# Altium PCB PCB_Transmitter_V2.PcbDoc
Units mm, origin at the board's own origin, x right, y up, seen from the top; angles counter-clockwise.
Board outline 42.04 x 58.55 mm, 2 copper layers (Top Layer, Bottom Layer); 19 components, 34 nets, 82 pads, 17 vias.
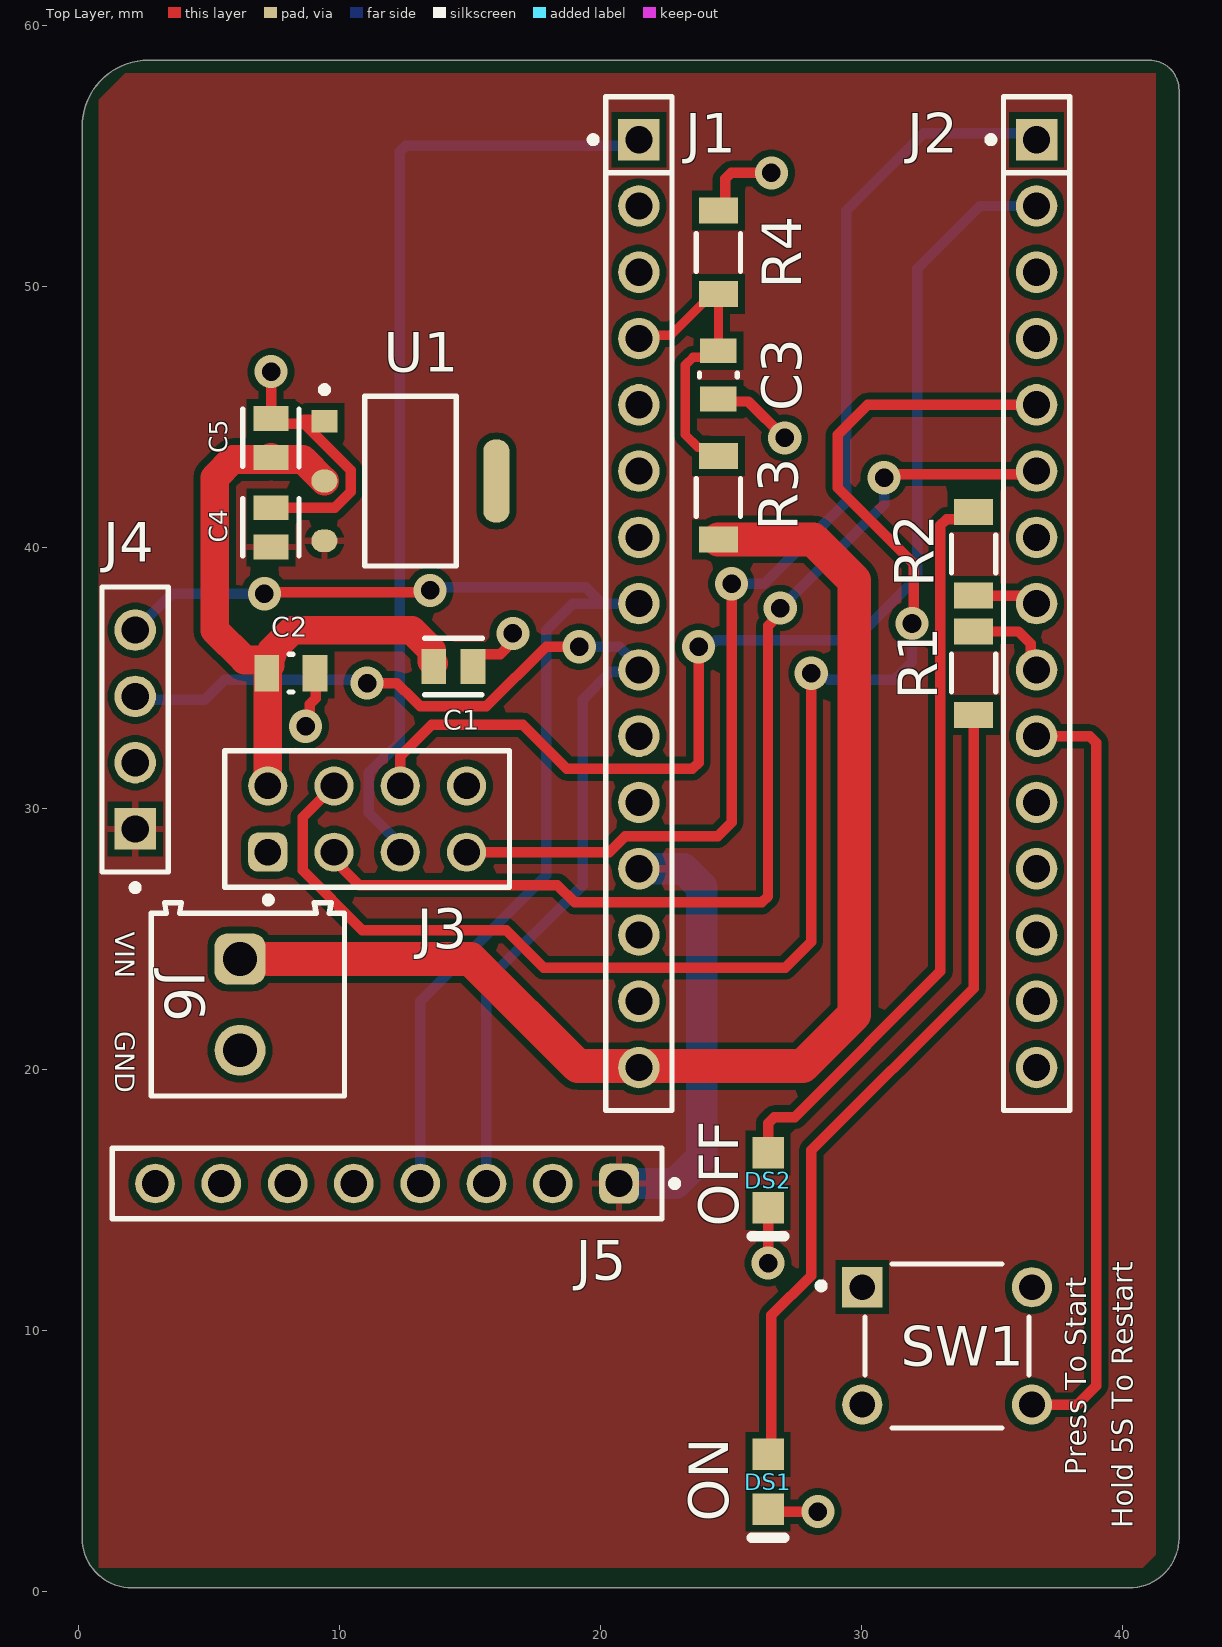
[diagram p0: Top Layer view]
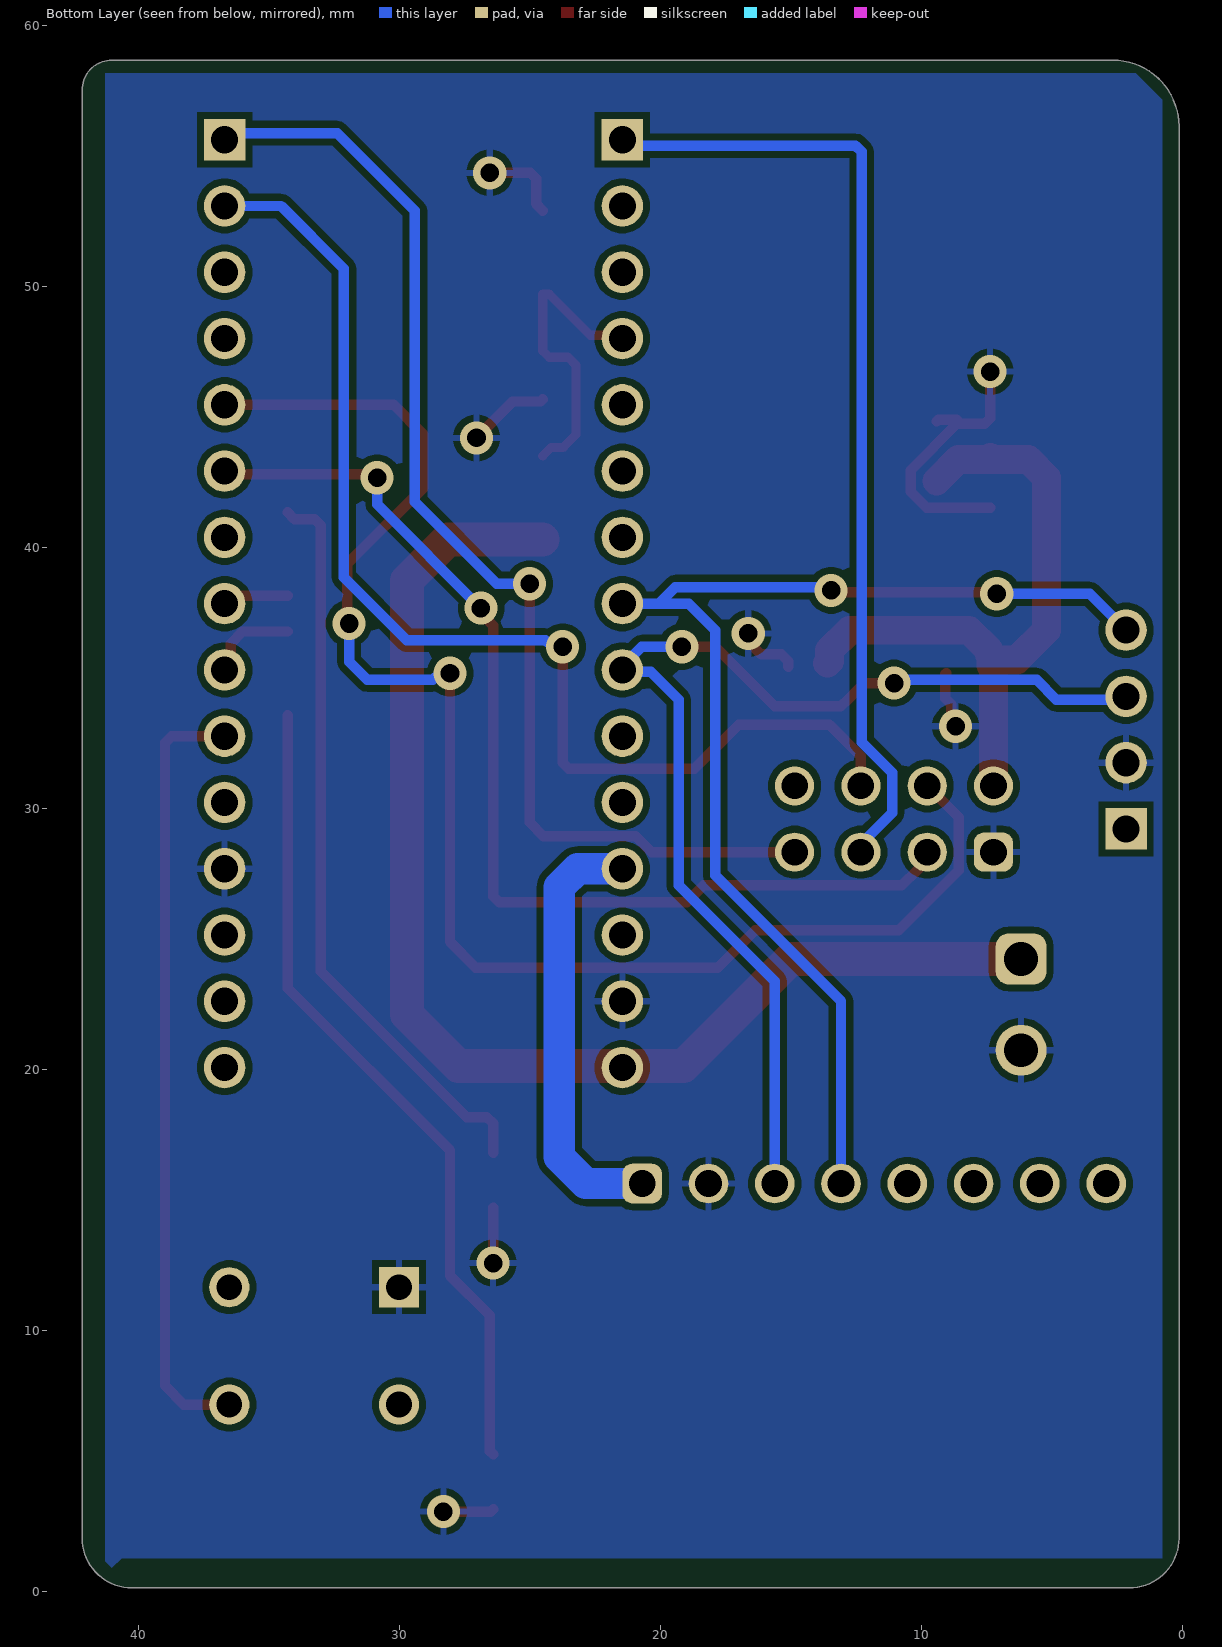
[diagram p1: Bottom Layer view, seen from below]
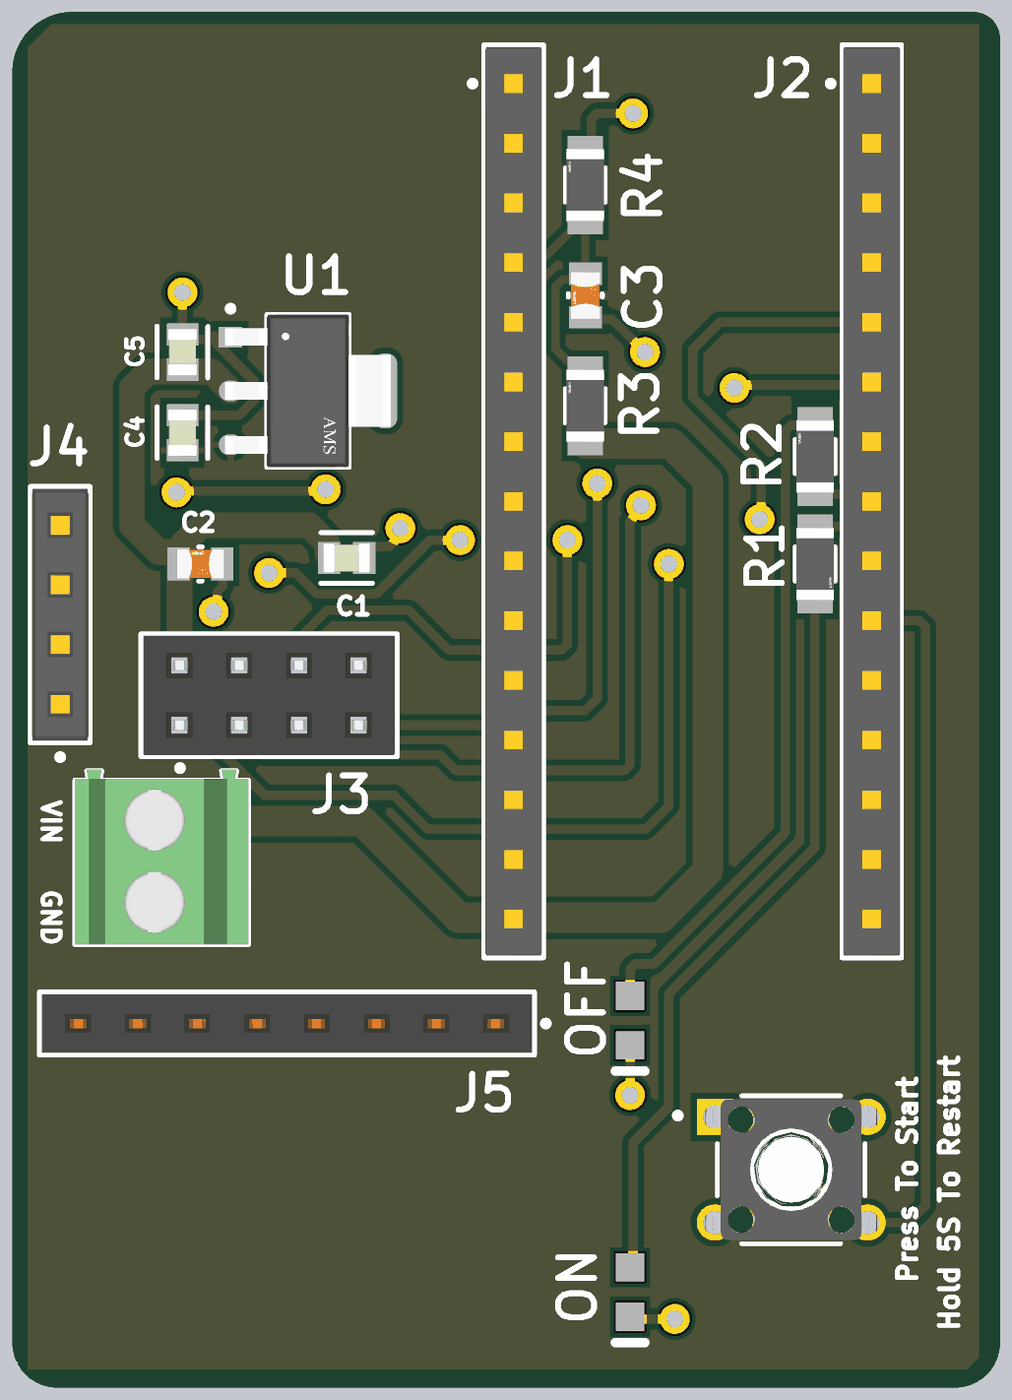
[diagram p2: 3D render of the assembled board from above, using the file's embedded part models]

## Layer stack, top to bottom
Top Solder: solder mask 0.0102, Solder Resist, Dk 3.5
Top Layer: signal copper 0.0356
Dielectric 1: dielectric 0.32, FR-4, Dk 4.8
Bottom Layer: signal copper 0.0356
Bottom Solder: solder mask 0.0102, Solder Resist, Dk 3.5

## Board outline
0.127,2.032 ccw(c2.032,2.032) 2.032,0.127 40.259,0.127 ccw(c40.259,2.032) 42.164,2.032 42.164,57.531 ccw(c41.021,57.531) 41.021,58.674 2.667,58.674 ccw(c2.667,56.134) 0.127,56.134

## Design rules (kind name [scope] priority, off if disabled: settings)
Clearance [All] p1: gap=0.254 ignorepadtopadclearanceinfootprint=FALSE
PolygonConnect [All] p1: connectstyle=Relief reliefconductorwidth=0.254 reliefentries=4 polygonreliefangle="90 Angle" airgapwidth=0.254
RoutingVias [All] p1: holewidth=0.711 width=1.27 viastyle="Through Hole" minholewidth=0.711 minwidth=1.27 maxholewidth=0.711 maxwidth=1.27
SilkToSilkClearance [All] p1: silktosilkclearance=0.15
SolderMaskExpansion [All] p1: expansion=0.102 istentingtop=FALSE
SupplyNets "Schematic Supply Nets_3" [InNet('+5V')] p1: voltage=0.000
SupplyNets "Schematic Supply Nets_2" [InNet('GND')] p2: voltage=0.000
SupplyNets "Schematic Supply Nets_1" [InNet('+3V3')] p3: voltage=0.000
SupplyNets "Schematic Supply Nets" [InNet('VIN')] p4: voltage=0.000
Width [All] p1: maxlimit=1.5 minlimit=0.254 preferedwidth=0.254
29 further rules are at their usual default settings.

## Components (designator, comment, footprint, x,y, rotation, side; value= is the part's Value field where it differs from the comment)
C1 "10uF" FP-C0805C-DG-MFG 14.351,35.433 r180 top
C2 "100nF" FP-CC0805-0_85-MFG 8.128,35.179 r180 top value="100 nF"
C3 "100nF" FP-CC0805-0_85-MFG 24.511,46.609 r270 top value="100 nF"
C4 "10uF" FP-C0805C-DG-MFG 7.366,40.767 r270 top
C5 "10uF" FP-C0805C-DG-MFG 7.366,44.196 r270 top
DS1 "Red LED" AVAG-HSMX-C170_V 26.416,4.191 r270 top
DS2 "Green LED" AVAG-HSMX-C170_V 26.416,15.748 r270 top
J1 "SSW-115-01-T-S" FP-SSW-115-01-T-S-MFG 21.463,37.846 r270 top locked
J2 "SSW-115-01-T-S" FP-SSW-115-01-T-S-MFG 36.703,37.846 r270 top locked
J3 "61300821821" 61300821821 11.049,29.591 r0 top
J4 "SSW-104-02-G-S" FP-SSW-104-02-G-S-MFG 2.159,33.02 r90 top
J5 "61300811821" 61300811821 11.811,15.621 r180 top
J6 "691214110002" 691214110002 6.477,22.479 r270 top
R1 "47R" FP-RC1206-MFG 34.29,35.179 r270 top value=0Ω
R2 "47R" FP-RC1206-MFG 34.29,39.751 r90 top value=0Ω
R3 "10kR" FP-RC1206-MFG 24.511,41.91 r90 top value=0Ω
R4 "10kR" FP-RC1206-MFG 24.511,51.308 r90 top value=0Ω
SW1 "2-1825910-7" FP-2-1825910-7-MFG 33.274,9.398 r90 top
U1 "AMS1117-3.3" FP-AMS1117-IPC_C 12.707,42.545 r0 top

## Footprints (in the part's own frame and the unit in brackets; to place one, negate y for a bottom-side part, rotate by r counter-clockwise, add the part's x,y. Pads: shape width x height; smd on the part's side, far side on the other; paste and mask are expansions set on the pad)
61300811821 [mm] "Socket Header, Pitch 2.54 mm, THT, Vertical, single row, 8p"
  rrect50% 1.52x1.52 hole 1.02: 1(-8.89,0)
  round 1.52 hole 1.02: 2(-6.35,0) 3(-3.81,0) 4(-1.27,0) 5(1.27,0) 6(3.81,0) 7(6.35,0) 8(8.89,0)
  silkscreen extent -11.15,-1.35 10.54,1.35, body extent -10.41,-1.25 10.41,1.25, height 8.55
61300821821 [mm] "Socket Header, Pitch 2.54 mm, THT, Vertical, dual row, 8p"
  rrect50% 1.5x1.5 hole 1.02: 1(-3.81,-1.27)
  round 1.5 hole 1.02: 2(-3.81,1.27) 3(-1.27,-1.27) 4(-1.27,1.27) 5(1.27,-1.27) 6(1.27,1.27) 7(3.81,-1.27) 8(3.81,1.27)
  silkscreen extent -5.46,-3.22 5.46,2.62, body extent -5.33,-2.54 5.33,2.54, height 8.45
691214110002 [mm] "3.50 mm Horizontal Entry Modular, 2p"
  rrect50% 1.95x1.95 hole 1.3: 1(-1.75,-0.3)
  round 1.95 hole 1.3: 2(1.75,-0.3)
  silkscreen extent -3.9,-3.7 3.5,3.7, body extent -3.95,-3.7 3.5,3.7, height 8.55
AVAG-HSMX-C170_V [mm] "SMD, 2-Leads, Body 2x1.25mm, Height 0.8mm"
  rect 1.2x1.2 smd: 1(-1.05,0) 2(1.05,0)
  silkscreen extent 2.15,-0.63 2.15,0.63, body extent -1,-0.63 1,0.63, height 0.8
FP-2-1825910-7-MFG [mm]
  rect 1.54x1.54 hole 0.99 paste-2539.97 mask+0: 1(2.25,3.25)
  round 1.54 hole 0.99 paste-2539.97 mask+0: 2(2.25,-3.25) 3(-2.25,3.25) 4(-2.25,-3.25)
  silkscreen extent -3.15,-3.15 3.15,4.95, body extent -3.24,-4.12 3.24,4.12, height 0.25
FP-AMS1117-IPC_C [mm]
  rect 1.004x0.872 smd paste+0 mask+0: 1(-3.295,2.29)
  rrect100% 1.004x0.872 smd paste+0 mask+0: 2(-3.295,0) 3(-3.295,-2.29)
  rrect87% 1.004x3.182 smd paste+0 mask+0: 4(3.295,0)
  silkscreen extent -3.42,-3.25 1.75,3.62, body extent -3.9,-3.35 3.9,3.35, height 0.25
FP-C0805C-DG-MFG [mm]
  rect 0.95x1.35 smd paste+0 mask+0: 1(-0.75,0) 2(0.75,0)
  silkscreen extent -1.11,-1.08 1.1,1.07, body extent -1.4,-0.85 1.4,0.85, height 0.25
FP-CC0805-0_85-MFG [mm]
  rect 0.95x1.4 smd paste+0 mask+0: 1(-0.925,0) 2(0.925,0)
  silkscreen extent -0.08,-0.72 0.08,0.72, body extent -1.6,-1.05 1.6,1.05, height 0.25
FP-RC1206-MFG [mm]
  rect 1x1.5 smd paste+0 mask+0: 1(-1.6,0) 2(1.6,0)
  silkscreen extent -0.72,-0.85 0.72,0.85, body extent -2.2,-0.95 2.2,0.95, height 0.25
FP-SSW-104-02-G-S-MFG [mm]
  rect 1.59x1.59 hole 1.04 paste-2539.97 mask+0: 1(-3.81,0)
  round 1.59 hole 1.04 paste-2539.97 mask+0: 2(-1.27,0) 3(1.27,0) 4(3.81,0)
  silkscreen extent -6.18,-1.27 5.46,1.27, body extent -5.56,-1.37 5.56,1.37, height 0.25
FP-SSW-115-01-T-S-MFG [mm]
  rect 1.59x1.59 hole 1.04 paste-2539.97 mask+0: 1(-17.78,0)
  round 1.59 hole 1.04 paste-2539.97 mask+0: 2(-15.24,0) 3(-12.7,0) 4(-10.16,0) 5(-7.62,0) 6(-5.08,0) 7(-2.54,0) 8(0,0) 9(2.54,0) 10(5.08,0) 11(7.62,0) 12(10.16,0) 13(12.7,0) 14(15.24,0) 15(17.78,0)
  silkscreen extent -19.43,-1.87 19.43,1.27, body extent -19.53,-1.37 19.53,1.37, height 0.25

## Part data
C1 C4 C5: library part CMP-2007-03243-2, "CAP CER 10UF 10V X5R 0805", 3DS Part Number=220-00001, Manufacturer=Kemet, Manufacturer Part Number=C0805C106K8PACTU, Package=C0805C-DG, Temperature="-55°C to +85°C", Temperature Characteristic=X5R, Temperature Coefficient=15%, Temperature Range High=+85°C, Temperature Range Low=-55°C, Tolerance=10%, Voltage=10V, Automotive=No, Capacitance=10uF, Category=Cap, ComponentLink2Description=Datasheet, ComponentLink2URL=https://content.kemet.com/datasheets/KEM_C1006_X5R_SMD.pdf, Device Class L1="Passive Components", Device Class L2=Capacitors, Device Class L3="Ceramic Capacitors", Digikey Description="CAP CER 10UF 10V X5R 0805", Height=1.4mm, Ipc Land Pattern Name=CAPC200125X125, Lead Free=Yes, Material=Ceramic, Mouser Description="CAP CER 10UF 10V X5R 0805", Octopart=https://octopart.com/c0805c106k8pactu-kemet-98697, RoHS=TRUE, Voltage Rating=10V
C2 C3: library part CMP-1036-04402-6, "CAP CER 0.1UF 16V X7R 0805", Capacitance="100 nF", Manufacturer=Yageo, Manufacturer Part Number=CC0805KRX7R7BB104, Package=CC0805-0.85, Temperature="-30°C to +85°C", Temperature Characteristic=X7R, Temperature Range High=+85°C, Temperature Range Low=-30°C, Tolerance=0.1, Voltage Rating="16 V", Automotive=No, Category=Cap, ComponentLink2Description=Datasheet, ComponentLink2URL=http://www.yageo.com/documents/recent/UPY-GPHC_Y5V_6.3V-to-50V_8.pdf, Device Class L1="Passive Components", Device Class L2=Capacitors, Device Class L3="Ceramic Capacitors", Digikey Description="CAP CER 0.1UF 16V X7R 0805", Footprint Url=http://www.yageo.com/exep/pages/download/literatures/UPY-C_GEN_24.pdf, Height=0.95mm, Ipc Land Pattern Name=CAPC200125X85, Lead Free=Yes, Material=Ceramic, Mouser Description="Multilayer Ceramic Capacitors MLCC - SMD/SMT 100nF 16V X7R 10%", Octopart=https://octopart.com/cc0805krx7r7bb104-yageo-39467769, RoHS=TRUE
DS1 DS2: library part CMP-2000-05062-1, "Chip LED, Green, 2.2 V, -40 to 85 degC, 2-Pin SMD, Pb-Free, Tape and Reel", Forward Current If=20mA, Forward Voltage=2.2V, Forward Voltage VF Max=2.6V, LED Colour=Green, Manufacturer=Avago, Operating Temperature Max=85degC, Operating Temperature Min=-30degC, Operating Temperature Range=-30degCto+85degC, Opto Case Style=SMD, Package Description="2-Pin Surface Mount Device, Body 2 x 1.25 mm, Height 0.8 mm", Package Reference=HSMX-C170, Storage Temperature Min=-40degC, Bulb Size=1.25mmx1.4mm, Datasheet URL=https://datasheet.ciiva.com/29280/180495-da-01-en-chip-led-hsmg-c170-gelb-gruen-29280971.pdf, Datasheet Version=Oct-08, Dominant Wavelength=572nm, Dominant Wavelength Typ=572nm, External Depth=0.8mm, External Length / Height=2mm, External Width=1.25mm, Forward Current If Max=20mA, LED Mounting=SMD, LED Type=Standard, Lens Shape=Rectangular, Light Area Height=1mm, Luminous Intensity=15mcd, Luminous Intensity Min=4mcd, Luminous Intensity Typ=15mcd, Manufacturer URL=http://www.avagotech.com/, Mounting Type=SMD, MSL=MSL2A-4weeks, No. of Pins=2, Opto Mounting Orientation=Top, Packaging=CutTape, Peak Forward Current=20mA, Peak Wavelength=570nm, PIV Max=5V, Storage Temperature Max=85degC, SVHC=NoSVHC(16-Jun-2014), Viewing Angle=170deg, Voltage Vf Typ=2.2V, Wavelength Typ=570nm
J1 J2: library part CMP-02766-001723-1, "CONN RCPT 15POS 0.1 TIN PCB", Color=Black, Contact Resistance=10mR, Max Current Rating=6.9A, Max Operating Temperature=105°C, Max Voltage Rating (AC)=550V, Min Operating Temperature=-55°C, Connector Type=Receptacle, Contact Material=Bronze, Contact Plating=Tin, Contact Type="Female Socket", Depth=2.41mm, Gender=Receptacle, Housing Color=Black, Housing Material=Polymer, Lead Free="Lead Free", Length=38.61mm, Mating Cycles=100, Mount="Through Hole", Number of Contacts=15, Number of Positions=15, Number of Rows=1, Orientation=Straight, Packaging=Bulk, Pitch=0.1inch, Radiation Hardening=No, REACH SVHC="No SVHC", RoHS Compliant=Yes, Series=SSW, Termination=Solder, Width=2.41mm
J3: library part CMP-1502-01329-3, Contact Resistance=20mΩ, Current Rating=3A, Operating Supply Voltage=250V, Gender=Female, Lead Pitch=2.54mm, NexarPartId=61924725, Number of Pins=8, Orientation=Vertical, RoHS=Non-Compliant
J4: library part CMP-00575-00296407-1, "SSW-104-02-G-S Board to Board & Mezzanine Connectors Tiger Buy Socket Strip with PCB Tails, .100 Pitch", Color=Black, Contact Resistance=10mΩ, Current Rating=4.7A, Manufacturer Lifecycle Status=PRODUCTION, Max Current Rating=6.9A, Max Operating Temperature=125°C, Max Voltage Rating (AC)=550V, Min Operating Temperature=-55°C, Voltage Rating (AC)=465V, Voltage Rating (DC)=655V, Connector Type="Receptacle, Socket", Contact Material="Bronze, Gold, Nickel", Contact Plating=Gold, Depth=2.41mm, Gender=Receptacle, Height=8.64mm, Housing Color=Black, Housing Material=Polymer, Lead Free="Lead Free", Lead Pitch=2.54mm, Length=10.67mm, Lifecycle Status=Production, Mount="Through Hole", NexarPartId=296407, Number of Contacts=4, Number of Positions=4, Number of Rows=1, Orientation=Straight, Packaging=Bulk, Pitch=2.54mm, Radiation Hardening=No, REACH SVHC="No SVHC", RoHS=Compliant, Termination=Solder, Voltage Rating=550V, Width=2.41mm
J5: library part CMP-1502-01327-3, Contact Resistance=20mΩ, Current Rating=3A, Operating Supply Voltage=250V, Gender=Female, Lead Pitch=2.54mm, NexarPartId=61924723, Number of Pins=8, Orientation=Vertical, RoHS=Non-Compliant
J6: library part CMP-1502-02464-2, Color="Blue, Green", Current=10A, Max Operating Temperature=105°C, Min Operating Temperature=-40°C, Voltage=300V, Contact Material=Brass, Contact Plating="Brass, Tin", Current Rating=10A, Height=8.7mm, Housing Material=Nylon, Lead Pitch=3.5mm, Length=7.4mm, Mount="Through Hole", NexarPartId=18818288, Number of Contacts=2, Number of Levels=1, Number of Pins=2, Number of Positions Per Level=2, Number of Rows=1, Packaging=Box, Pitch=3.5052mm, Plating="Brass, Steel", REACH SVHC=Unknown, RoHS=Compliant, Stripping Length=-6mm, Termination=Screw, Voltage Rating=300V, Width=7.9mm, Wire Gauge (Max)=24AWG, Wire Gauge (Min)=16AWG, Wire/Cable Gauge=24AWG
R1 R2 R3 R4: library part CMP-2100-03681-2, "RES SMD 0 OHM JUMPER 1/4W 1206", Manufacturer=YAGEO, Manufacturer Part Number=RC1206JR-070RL, Package=RC1206, Power Rating=0.25W, Resistance=0Ω, Temperature="-55°C to +155°C", Temperature Coefficient=300ppm/°C, Temperature Range High=+155°C, Temperature Range Low=-55°C, Tolerance=5%, Voltage Rating=200V, Automotive=No, Category=Res, ComponentLink2Description=Datasheet, ComponentLink2URL=https://www.yageo.com/upload/media/product/productsearch/datasheet/rchip/PYu-RC_Group_51_RoHS_L_10.pdf, Composition="Thick Film", Device Class L1="Passive Components", Device Class L2=Resistors, Device Class L3="Chip SMD Resistors", Digikey Description="RES SMD 0 OHM JUMPER 1/4W 1206", Footprint Url=https://www.yageo.com/upload/website/yageo_PYu-R_Mount_10_19050818_343.pdf, Height=0.65mm, Ipc Land Pattern Name=RESC310160X55, Lead Free=Yes, Mouser Description="Resistor: thick film; SMD; 1206; 0O; 0.25W; ±5%; -55÷155°C", Octopart=https://octopart.com/rc1206jr-070rl-yageo-40025601, RoHS=TRUE, Series=RC
SW1: library part CMP-03402-000004-1, "SWITCH TACTILE SPST-NO 0.05A 24V", Contact Current Rating=50mA, Contact Resistance=100mΩ, Manufacturer="TE Connectivity", Operating Force=160gf, Temperature="-35°C to +85°C", Temperature Range High=+85°C, Temperature Range Low=-35°C, Voltage Rating Dc=24V, Automotive=No, Category=Switch, ComponentLink2Description=Datasheet, ComponentLink2URL=https://www.te.com/commerce/DocumentDelivery/DDEController?Action=showdoc&DocId=Customer+Drawing%7F1825910%7FC10%7Fpdf%7FEnglish%7FENG_CD_1825910_C10.pdf%7F2-1825910-7, Device Class L1=Electromechanical, Device Class L2=Switches, Device Class L3="Pushbutton Switches", Digikey Description="SWITCH TACTILE SPST-NO 0.05A 24V", Electromechanical Life=100000Cycles, Height=13.3mm, Lead Free=Yes, Manufacturer Part Number=2-1825910-7, Mount="Through Hole", Mouser Description="Switch Tactile OFF (ON) SPST Extended Round Button PC Pins 0.05A 24VDC 100000Cycles 1.57N Thru-Hole Loose", Octopart=https://octopart.com/2-1825910-7-te+connectivity-42270510, Package=2-1825910-7, RoHS=TRUE, Throw Configuration=SPST-NO
U1: library part CMP-209535-000001-1, "LDO Voltage Regulators 1A, 3.3V", Dropout Voltage=1.1V, Manufacturer="Advanced Monolithic Systems", Max Junction Temp=+125°C, Max Power Dissipation=1.2W, Max Supply Voltage=15V, Nominal Supply Current=5mA, Output Current=1A, Output Voltage=3.3V, Package=AMS1117, Temperature="-40°C to +125°C", Temperature Range Low=-40°C, Automotive=No, Category=IC, ComponentLink2Description=Datasheet, ComponentLink2URL=http://www.advanced-monolithic.com/pdf/ds1117.pdf, Device Class L1="Integrated Circuits (ICs)", Device Class L2="Power Management ICs", Device Class L3="Voltage Regulators - Linear", Height=1.8mm, Ipc Land Pattern Name=SOT229P700X180-4, Lead Free=Yes, Manufacturer Part Number=AMS1117-3.3, Number Of Outputs=1, Octopart=https://octopart.com/ams1117-3.3-advanced+monolithic+systems-25899300, Output Type=Fixed, RoHS=TRUE, Standoff Height=0.64mm, Temperature Range High=+125°C

## Via types
v1: diameter 1.27, hole 0.711, Top Layer to Bottom Layer, 17 vias

## Nets (pads, with @x,y where several pads share a name; then routed paths per layer and width w, separated by ;. In a path a pad name is that pad's centre, name@x,y a point inside that pad or via, vN(x,y) a via of type N, cw(c..) or ccw(c..) an arc to the next point about the centre after c; other vN are vias at no path point)
+3V3: C1.2 C2.2 C5.2 J3.2 U1.2 | length 25.9
  Top Layer w1.1: J3.2 7.239,35.394 7.33,35.485 7.33,35.56 C2.2@7.33,35.612 ; U1.2 8.586,43.371 7.441,43.371 C5.2 7.291,43.371 5.906,43.371 5.207,42.672 5.207,36.83 6.35,35.687 7.255,35.687 C2.2@7.33,35.612 ; C1.2@13.601,35.56 13.526,35.635 13.526,36.059 12.755,36.83 8.176,36.83 7.405,36.059 7.405,35.884 7.33,35.809 C2.2@7.33,35.612
+5V: C4.2 J1.12 J4.1 J5.1 U1.3 | length 16.6
  Bottom Layer w1.2: J5.1 22.86,15.621 23.876,16.637 23.876,26.983 23.173,27.686 J1.12
A0: C3.1 J1.4 R3.2 R4.1 | length 11.7
  Top Layer w0.35: J1.4 21.59,48.133 22.686,48.133 24.261,49.708 R4.1 C3.1 24.265,47.288 23.539,47.288 23.241,46.99 23.241,44.323 23.729,43.835 24.186,43.835 R3.2
A1: J1.5
A2: J1.6
A3: J1.7
A6: J1.10
A7: J1.11
ADO: J5.7
D0: J2.15
D1: J2.14
D2: J2.11
D3: J2.10 SW1.4 | length 29.8
  Top Layer w0.4: SW1.4 38.263,7.148 38.989,7.874 38.989,32.512 38.735,32.766 J2.10
D4: J2.9 R1.1 | length 3.5
  Top Layer w0.4: R1.1 36.004,36.779 36.475,36.307 36.475,35.534 J2.9
D5: J2.8 R2.1 | length 2.5
  Top Layer w0.4: R2.1 36.076,38.151 36.381,37.846 J2.8
D6: J2.7
D7: J2.6 J3.3 | length 41.7
  Top Layer w0.4: J3.3@9.42,28.382 10.185,27.618 10.751,27.051 18.343,27.051 18.999,26.395 26.178,26.395 26.412,26.629 26.412,37.006 26.88,37.474 v1(26.88,37.675) ; v1(30.861,42.672) 30.988,42.799 36.576,42.799 J2.6
  Bottom Layer w0.4: v1(26.88,37.675) 30.861,41.656 v1(30.861,42.672)
D8: J2.5 J3.4 | length 57.8
  Top Layer w0.4: J3.4 8.575,29.657 8.575,27.62 10.862,25.333 16.376,25.333 17.812,23.897 27.072,23.897 28.067,24.892 v1(28.067,35.179) ; v1(31.931,37.084) 32.004,37.157 32.004,39.37 29.083,42.291 29.083,44.323 30.226,45.466 J2.5
  Bottom Layer w0.4: v1(28.067,35.179) 28.233,35.013 28.649,35.013 28.736,34.925 31.242,34.925 31.931,35.614 v1(31.931,37.084)
D9: J2.4
D10: J2.3
GND: C1.1 C2.1 C3.2 C4.1 C5.1 DS1.2 DS2.2 J1.14 J2.12 J3.1 J4.2 J5.2 J6.2 R4.2 SW1.1 U1.1 | length 25.6
  Top Layer w0.4: C4.1 9.804,41.517 10.416,42.129 10.416,42.961 8.641,44.736 7.576,44.736 C5.1 v1(7.366,46.736) ; 8.641,44.89 9.357,44.89 U1.1 ; v1(8.69,33.147) 8.856,33.313 8.856,33.998 9.083,34.225 9.083,35.149 C2.1 ; C1.1 15.101,35.633 15.376,35.908 16.149,35.908 16.383,36.142 16.383,36.214 16.637,36.468 v1(16.637,36.703) ; C3.2 24.602,45.593 25.654,45.593 v1(27.051,44.196) ; R4.2 24.765,53.162 24.765,54.122 24.999,54.356 v1(26.543,54.356) ; DS1.2 26.509,3.048 v1(28.321,3.048) ; v1(26.416,12.573) DS2.2
INT: J5.8
MISO: J2.1 J3.7 | length 45.3
  Top Layer w0.4: J3.7 20.332,28.321 20.946,28.935 24.49,28.935 25.019,29.464 v1(25.019,38.608)
  Bottom Layer w0.4: v1(25.019,38.608) 26.273,38.608 29.411,41.746 29.411,52.906 32.385,55.88 36.449,55.88 J2.1
MOSI: J2.2 J3.6 | length 45.2
  Top Layer w0.4: J3.6 12.319,32.004 13.523,33.208 17.008,33.208 18.699,31.517 23.515,31.517 23.749,31.751 v1(23.749,36.195)
  Bottom Layer w0.4: v1(23.749,36.195) 23.915,36.361 24.331,36.361 24.418,36.449 29.718,36.449 32.131,38.862 32.131,50.673 34.544,53.086 J2.2
NetDS1_1: DS1.1 R1.2 | length 31.6
  Top Layer w0.4: DS1.1 26.543,5.368 26.543,10.568 28.067,12.092 28.067,16.891 34.29,23.114 R1.2
NetDS2_1: DS2.1 R2.2 | length 28.7
  Top Layer w0.4: DS2.1 26.416,17.927 26.65,18.161 27.432,18.161 33.02,23.749 33.02,40.854 33.254,41.088 34.027,41.088 R2.2
REF: J1.3
RST: J1.13
SCK: J1.1 J3.5 | length 37.2
  Bottom Layer w0.4: J3.5 12.319,28.619 11.115,29.823 11.115,31.36 12.292,32.537 12.292,55.165 12.526,55.399 21.236,55.399 J1.1
SCL: J1.9 J4.3 J5.3 | length 44.2
  Top Layer w0.4: v1(11.049,34.798) 12.192,34.798 12.827,34.163 12.829,34.163 13.083,33.909 15.621,33.909 17.907,36.195 v1(19.177,36.195)
  Bottom Layer w0.4: J4.3 2.286,34.163 4.826,34.163 5.588,34.925 10.922,34.925 v1(11.049,34.798) ; J5.3 15.621,23.368 19.304,27.051 19.304,34.163 20.369,35.228 21.385,35.228 J1.9 21.463,35.443 20.711,36.195 v1(19.177,36.195)
SDA: J1.8 J4.4 J5.4 | length 46
  Top Layer w0.4: v1(7.112,38.227) 7.175,38.291 13.399,38.291 v1(13.462,38.354)
  Bottom Layer w0.4: J4.4 3.556,38.227 v1(7.112,38.227) ; J5.4 13.081,22.606 17.907,27.432 17.907,36.83 18.923,37.846 20.066,37.846 ; v1(13.462,38.354) 13.589,38.481 19.431,38.481 20.066,37.846 ; J1.8 20.066,37.846
VIN: J1.15 J6.1 R3.1 | length 48.6
  Top Layer w1.3: J6.1 15.014,24.229 19.122,20.121 21.408,20.121 J1.15 21.518,20.121 27.741,20.121 29.718,22.098 29.718,38.735 28.143,40.31 R3.1
XCL: J5.6
XDA: J5.5
pads on no net: J1.2 J2.13 J3.8 SW1.2 SW1.3 U1.4

## Polygon pours and split planes (outlines as drawn)
GND on Bottom Layer "GND_L02_P000" (solid, pour order 0): 41.275,58.166 41.275,1.143 41.021,0.889 40.64,1.27 0.762,1.27 0.762,57.15 1.778,58.166
+5V on Top Layer "+5V_L01_P001" (solid, pour order 1): 1.778,58.166 41.275,58.166 41.275,1.397 40.767,0.889 0.762,0.889 0.762,57.15

## Silkscreen, mask and mechanical layers (free items; w line width, h text height)
Top Overlay:
  text "VIN" at 1.397,25.273 h0.76 r270
  text "GND" at 1.397,21.463 h0.76 r270
  text "OFF" at 25.273,13.97 h1.52 r90
  text "Press To Start" at 38.608,4.445 h0.8 r90
  text "ON" at 24.892,2.667 h1.52 r90
  text "Hold 5S To Restart" at 40.386,2.413 h0.8 r90
Mechanical 1:
  the board outline again, w0.254